# Altium PCB SSD1306_v2_PCB.PcbDoc
Units mm, origin at the board's own origin, x right, y up, seen from the top; angles counter-clockwise.
Board outline 22.5 x 38.5 mm, 2 copper layers (Top Layer, Bottom Layer), stack 1.571 mm thick; 3 components, 4 nets, 14 pads, 0 vias.
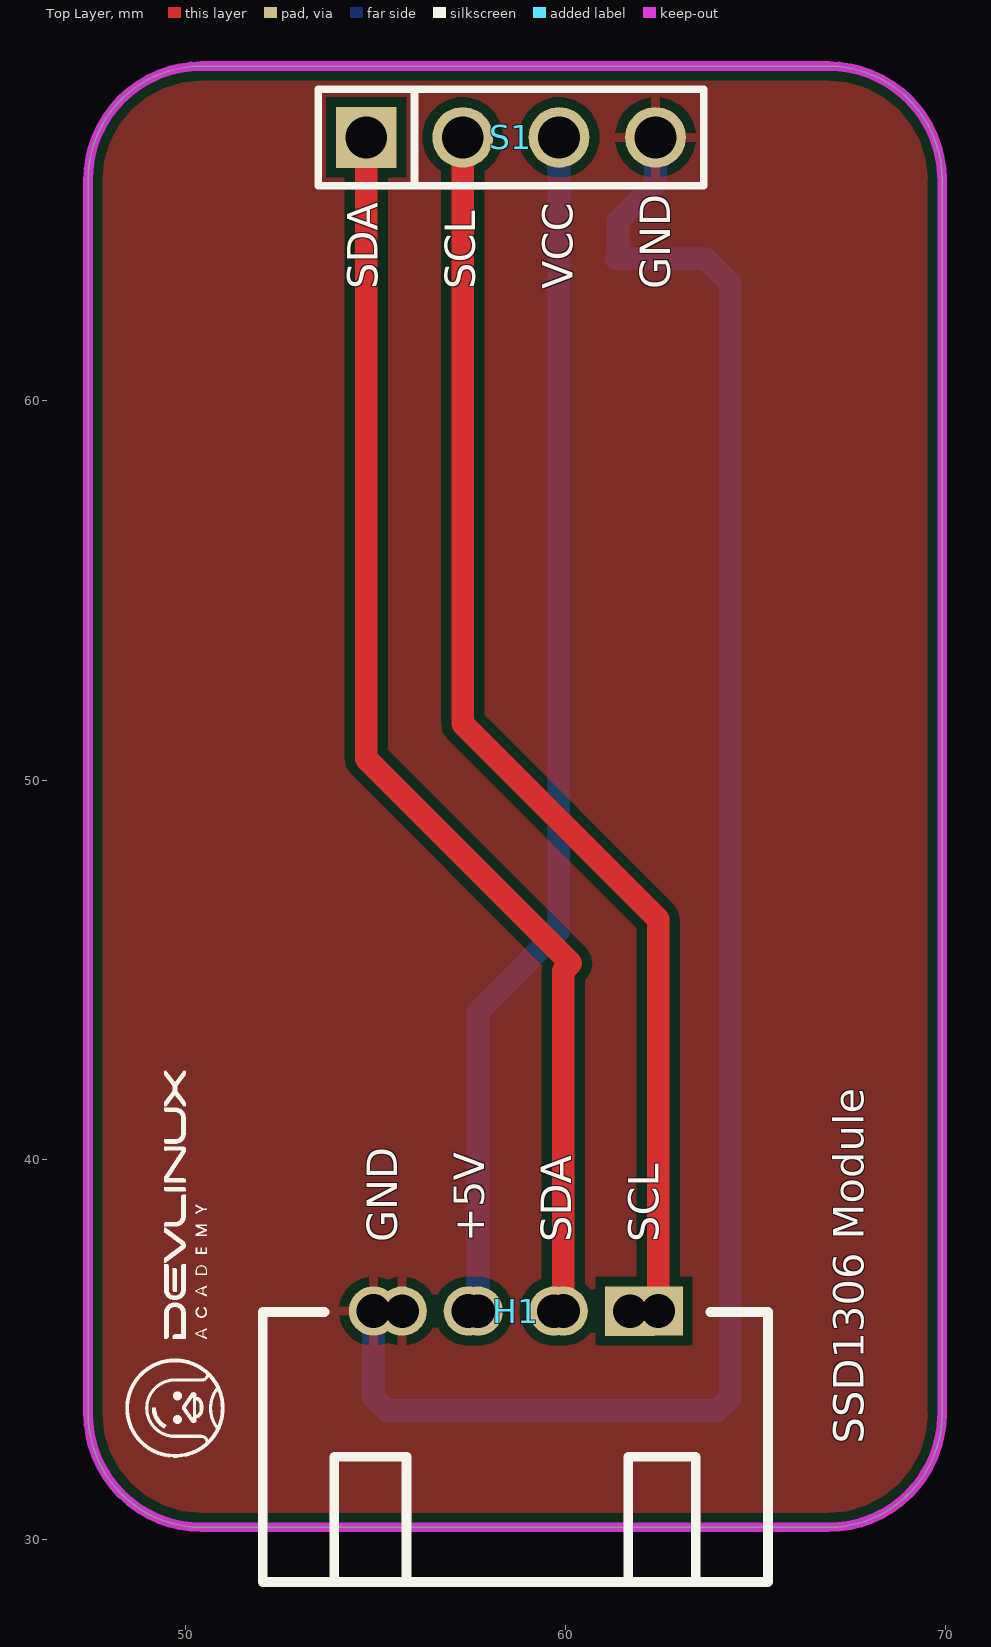
[diagram p0: Top Layer view]
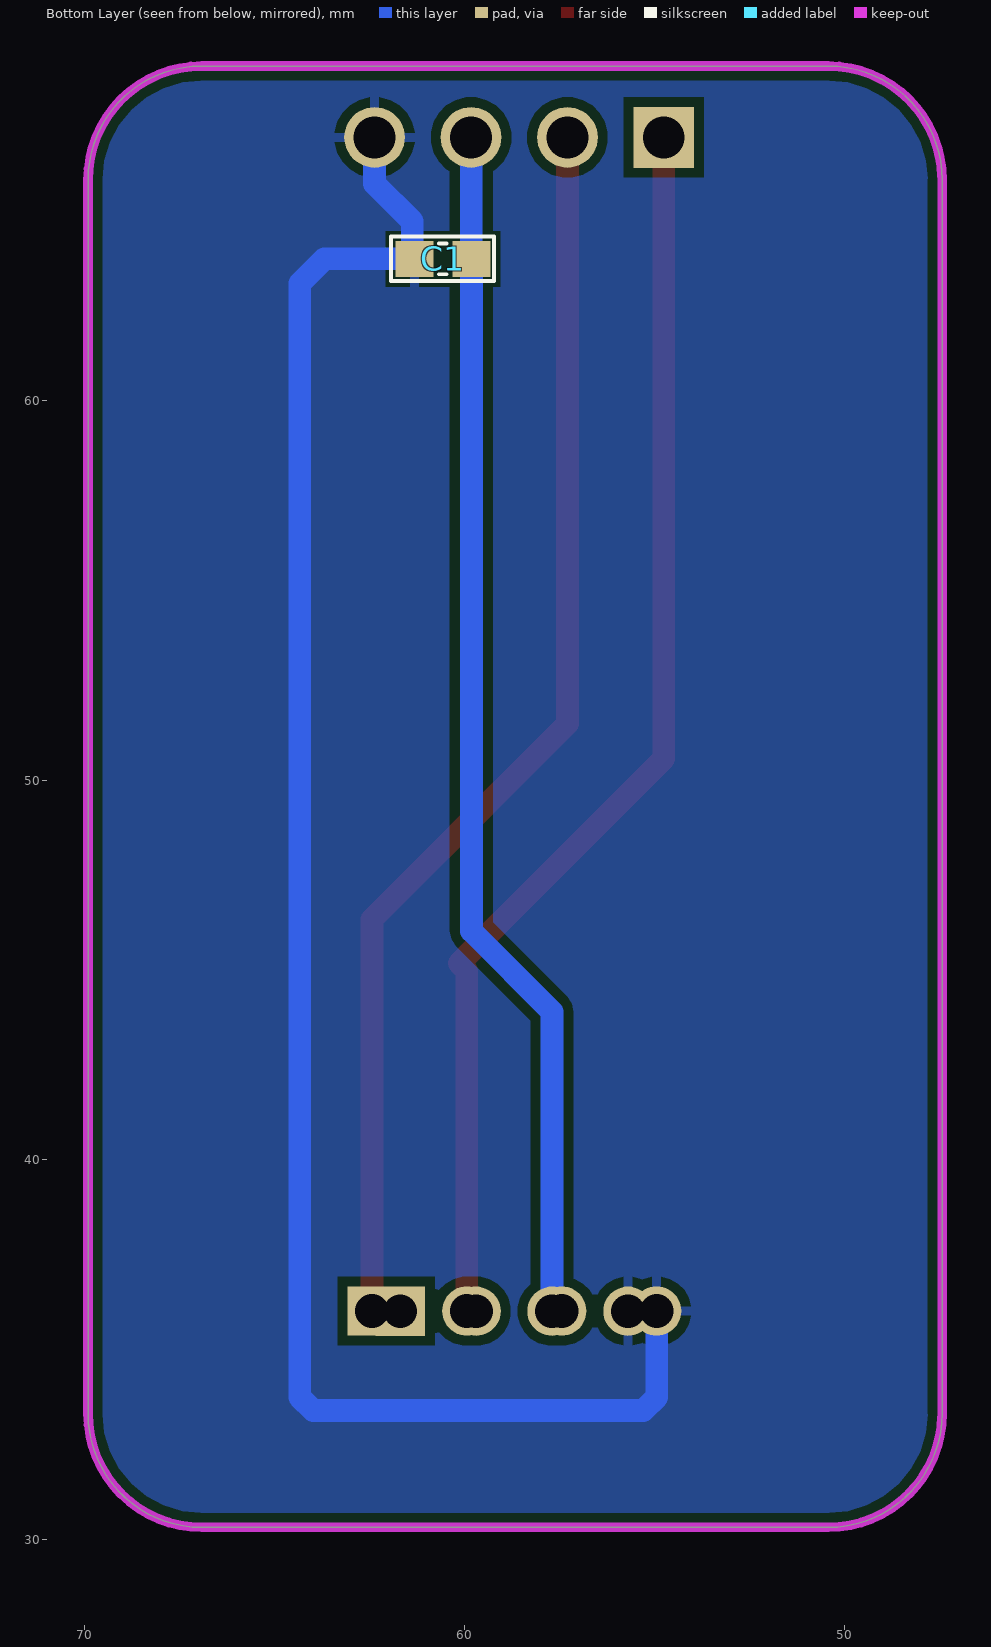
[diagram p1: Bottom Layer view, seen from below]

## Layer stack, top to bottom
Top Solder: solder mask 0.0102, Solder Resist, Dk 3.5
Top Layer: signal copper 0.0356
Dielectric 1: dielectric 1.5, FR-4, Dk 4.8
Bottom Layer: signal copper 0.0356
Bottom Solder: solder mask 0.0102, Solder Resist, Dk 3.5

## Board outline
47.42,33.32 47.42,65.82 cw(c50.42,65.82) 50.42,68.82 66.92,68.82 cw(c66.92,65.82) 69.92,65.82 69.92,33.32 cw(c66.92,33.32) 66.92,30.32 50.42,30.32 cw(c50.42,33.32)

## Design rules (kind name [scope] priority, off if disabled: settings)
Clearance [All] p1: gap=0.254 ignorepadtopadclearanceinfootprint=FALSE except(0: Arc-Hole Track-Hole SMDPad-Hole THPad-Hole Via-Hole Fill-Hole Poly-Hole Region-Hole Text-Hole)
PolygonConnect [All] p1: connectstyle=Relief reliefconductorwidth=0.254 reliefentries=4 polygonreliefangle="90 Angle" airgapwidth=0.254
RoomDefinition SSD1306_v2_SCH [InComponentClass('SSD1306_v2_SCH')] p1: confinementstyle=ConfineIn formatcopy=TRUE lockcomponents=FALSE outline 178.943,26.797 207.391,26.797 207.391,46.101 178.943,46.101
RoutingVias [All] p1: holewidth=0.711 width=1.27 viastyle="Through Hole" minholewidth=0.711 minwidth=1.27 maxholewidth=0.711 maxwidth=1.27
SolderMaskExpansion [All] p1: expansion=0.102 istentingtop=FALSE
Width NET [All] p1: maxlimit=0.6 minlimit=0.4 preferedwidth=0.5
30 further rules are at their usual default settings.

## Components (designator, comment, footprint, x,y, rotation, side; value= is the part's Value field where it differs from the comment)
C1 "100nF" "tu 0603" 60.57,63.74 r0 bottom
H1 "Header 4P 2.54 + 2.0 Duc Cong" "Header 4P DC 2.54 + 2.0" 62.415,35.995 r270 top
S1 "JP 1x4 2.54" SSD1306_0.96 54.75,66.94 r0 top

## Footprints (in the part's own frame and the unit in brackets; to place one, negate y for a bottom-side part, rotate by r counter-clockwise, add the part's x,y. Pads: shape width x height; smd on the part's side, far side on the other; paste and mask are expansions set on the pad)
"Header 4P DC 2.54 + 2.0" [mm]
  rect 1.3x1.3 hole 0.889: 1(-0.025,0.025) 1(-0.022,-0.719)
  round 1.3 hole 0.889: 2(-0.025,-2.475) 2(-0.022,-2.719) 3(-0.025,-4.975) 3(-0.022,-4.719) 4(-0.025,-7.475) 4(-0.022,-6.718)
  silkscreen extent 0,-10.39 7.11,2.92, body extent 0.13,-10.48 7.06,3.11, height 7.38
SSD1306_0.96 [mm] "I2C"
  rect 1.6x1.6 hole 1.1: 1(0,0)
  round 1.6 hole 1.1: 2(2.54,0) 3(5.08,0) 4(7.62,0)
  silkscreen extent -1.27,-1.27 8.89,1.27, body extent -8.89,-24.84 16.51,1.36, height 3.3
"tu 0603" [mm] "Chip Capacitor, 2-Leads, Body 1,60x0,80mm, IPC Medium Density"
  rect 1x0.95 smd mask+0.076: 1(-0.75,0) 2(0.75,0)
  silkscreen extent -1.35,-0.58 1.37,0.58, body extent -0.8,-0.4 0.8,0.4, height 0.9

## Part data
C1: library part "Tu 0603 104 50V 10%", "Dán", Chung_Loai=Dán, Don_Vi=Con, Ma_Hang=MH004568, So_Chan=2, Ten_Linh_Kien="Tụ 0603 104-100nF 10% 50V"
H1: "Cắm", Chung_Loai=Cắm, Don_Vi=Con, Ma_Hang=MH001310, Ten_Linh_Kien="Header 4P XH2.54-4P Đực Cong"
S1: library part SSD1306_0.96, "Cắm", Chung_Loai=Cắm, Don_Vi=Con, Ma_Hang=MH000903, Ten_Linh_Kien="Jump Đơn Đực 2.54MM 1x40P Thẳng 11MM"

## Nets (pads, with @x,y where several pads share a name; then routed paths per layer and width w, separated by ;. In a path a pad name is that pad's centre, name@x,y a point inside that pad or via, vN(x,y) a via of type N, cw(c..) or ccw(c..) an arc to the next point about the centre after c; other vN are vias at no path point)
+5: C1.1 H1.3 S1.3 | length 31.8
  Bottom Layer w0.6: H1.3@57.696,36.017 57.696,43.906 59.82,46.03 C1.1 59.825,63.745 59.825,66.935 S1.3
GND: C1.2 H1.4 S1.4 | length 48.2
  Bottom Layer w0.6: H1.4@54.94,36.02 54.94,33.751 55.291,33.4 63.989,33.4 64.34,33.751 64.34,63.09 63.69,63.74 C1.2 61.379,63.799 61.379,64.729 62.37,65.72 S1.4
I2C1_SCL: H1.1 S1.2 | length 33.1
  Top Layer w0.6: S1.2 57.29,51.49 62.44,46.34 H1.1@62.44,36.02
I2C1_SDA: H1.2 S1.1 | length 33.2
  Top Layer w0.6: S1.1 54.75,50.57 60.14,45.18 59.94,44.98 H1.2@59.94,36.02

## Polygon pours and split planes (outlines as drawn)
GND on Bottom Layer "NONET_L-01_P-001" (solid, remove dead copper, pour order 0): 46.38,75.04 46.7,74.72 74.55,74.72 74.55,25.89 72.89,27.55 44.35,27.55
GND on Top Layer "NONET_L-01_P-001" (solid, remove dead copper, pour order 1): 46.26,74.85 74.48,74.85 74.8,74.53 74.74,74.47 74.74,26.02 46.07,26.02 44.54,27.55

## Keep-outs
Keep-Out Layer:
  the board outline again, w0.254

## Silkscreen, mask and mechanical layers (free items; w line width, h text height)
Top Overlay:
  drawing of 21 lines, arcs and shapes, not listed
  text "SDA" at 55.05,62.94 h0.8 r90
  text "SCL" at 57.62,62.94 h0.8 r90
  text "VCC" at 60.19,62.94 h0.8 r90
  text "GND" at 62.76,62.94 h0.8 r90
  text "GND" at 55.57,37.83 h0.8 r90
  text "+5V" at 57.863,37.83 h0.8 r90
  text "SDA" at 60.157,37.83 h0.8 r90
  text "SCL" at 62.45,37.83 h0.8 r90
  text "SSD1306 Module" at 67.85,32.52 h0.8 r90